# Altium PCB 滴速检测模块.pcbdoc
Units mil, origin at the board's own origin, x right, y up, seen from the top; angles counter-clockwise.
Board outline 1915 x 1400 mil, 2 copper layers (Top Layer, Bottom Layer); 15 components, 9 nets, 39 pads, 9 vias.
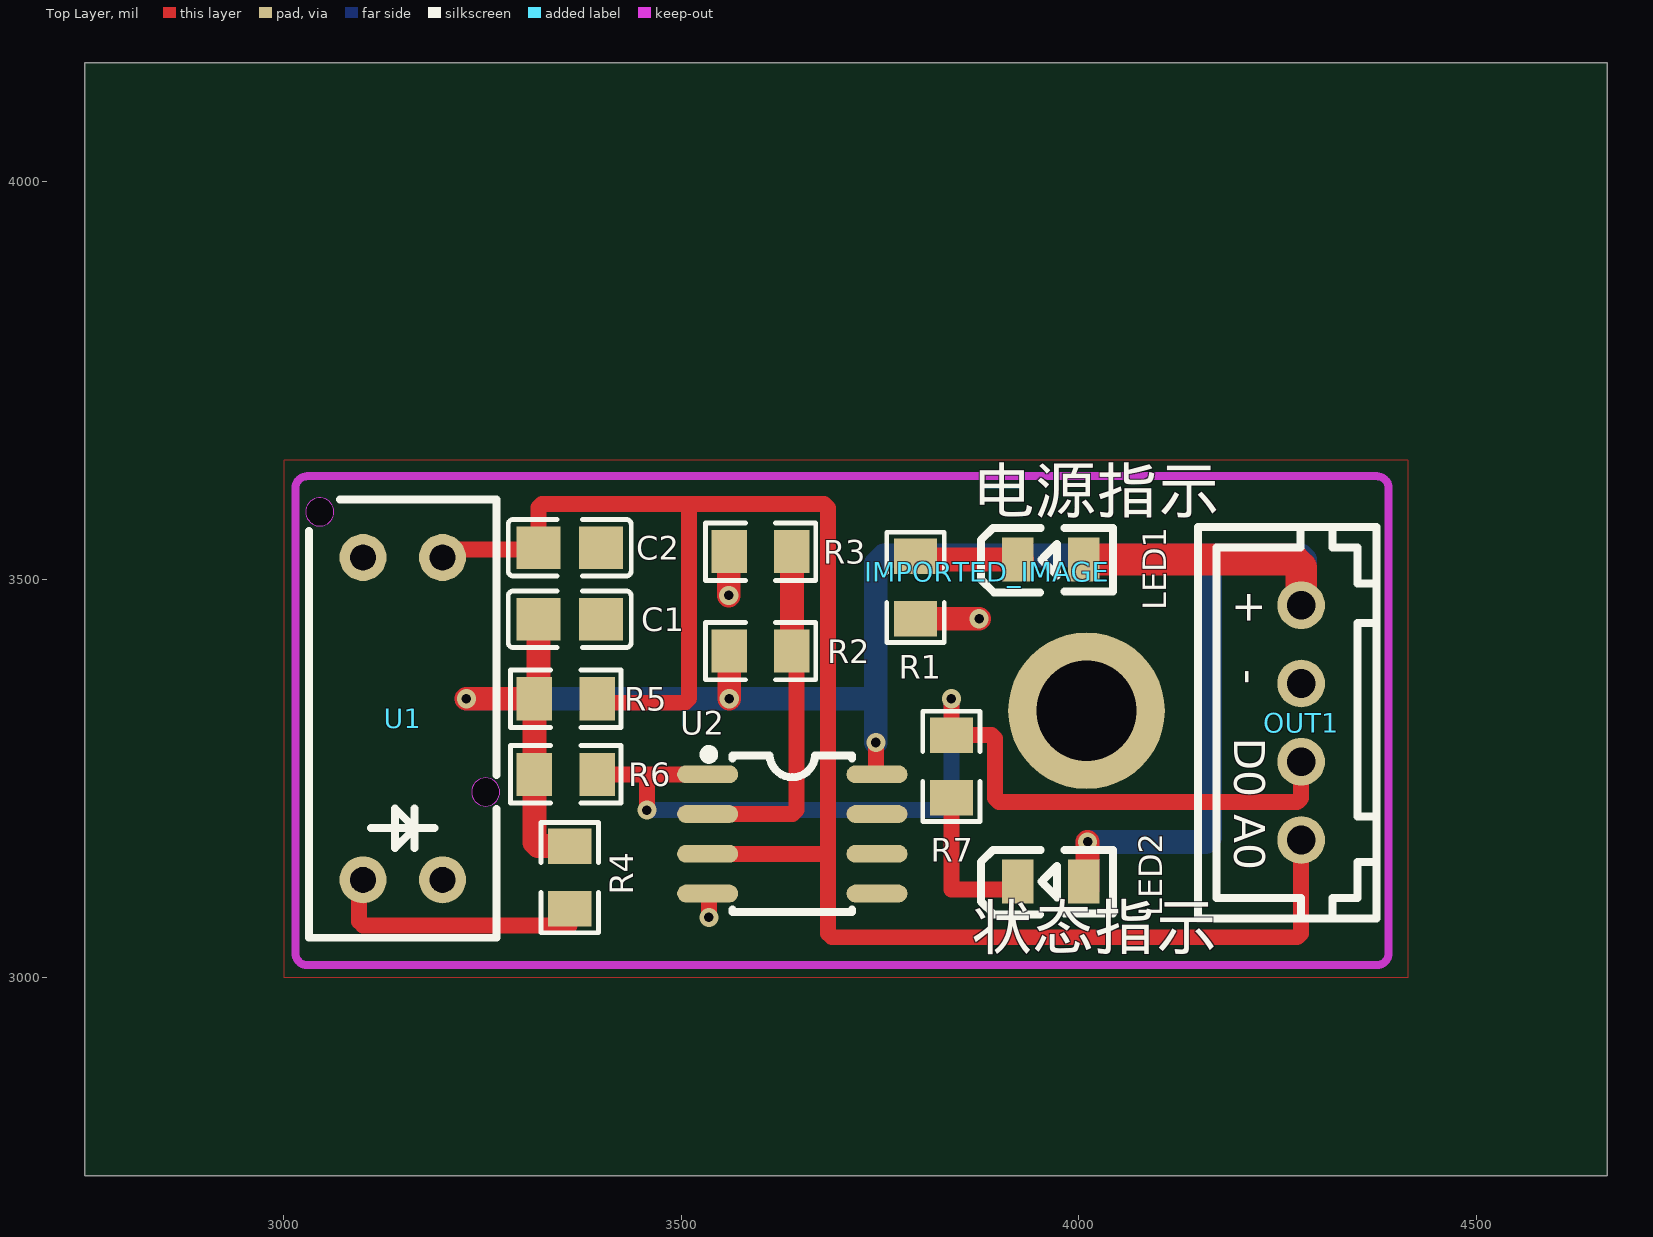
[diagram p0: Top Layer view]
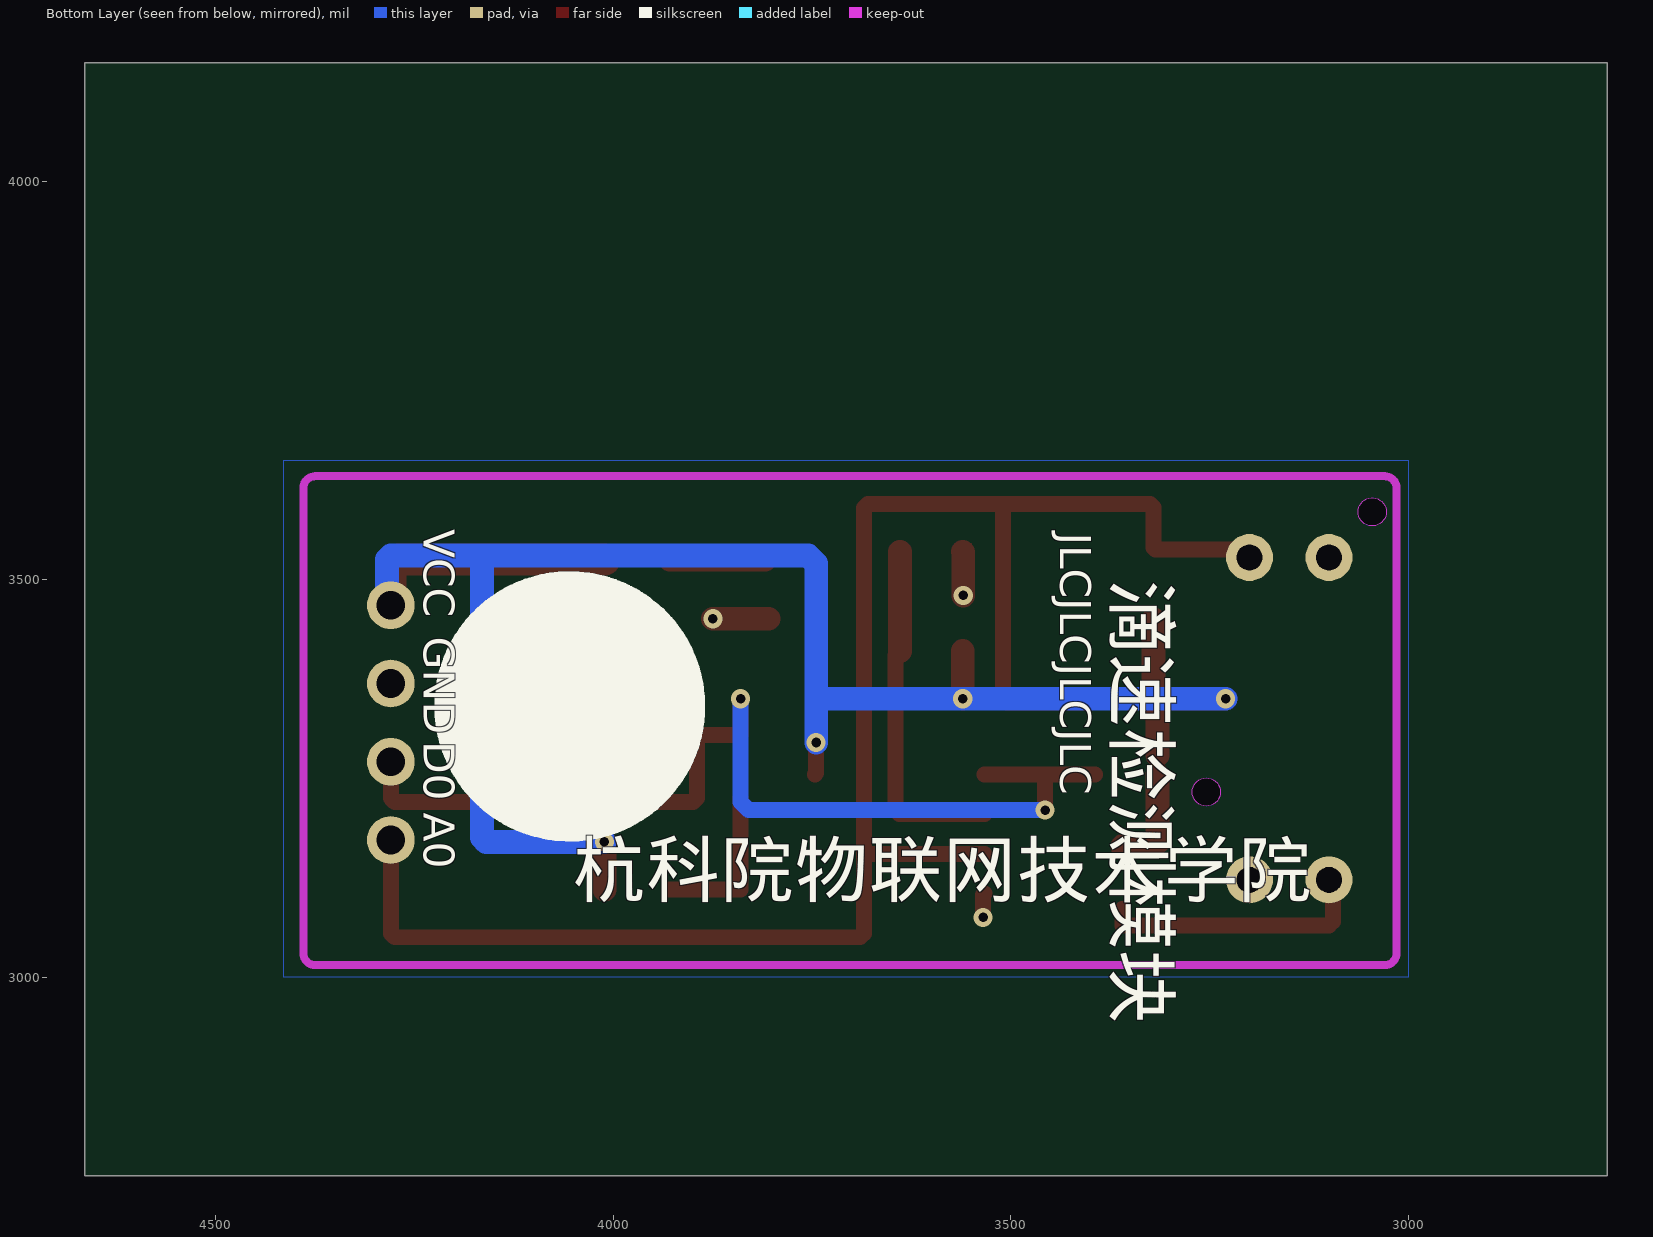
[diagram p1: Bottom Layer view, seen from below]

## Layer stack, top to bottom
Top Layer: signal copper (thickness not stored)
Dielectric: dielectric 12.6, FR-4, Dk 4.8
Bottom Layer: signal copper (thickness not stored)

## Board outline
4665,2750 2750,2750 2750,4150 4665,4150

## Components (designator, comment, footprint, x,y, rotation, side; value= is the part's Value field where it differs from the comment)
C1 "0805B104K500NT" C0805 3360,3450 r180 top
C2 "0805B104K500NT" C0805 3360,3540 r0 top
IMPORTED_IMAGE "IMPORTED_IMAGE" IMPORTED_IMAGE 3885,3510 r0 top
LED1 "NCD0805R1" LED0805-R-RD 3965,3525 r0 top
LED2 "NCD0805R1" LED0805-R-RD 3965,3120 r0 top
OUT1 "XH-4PA" 槽型光耦 4280,3320 r270 top
R1 "0805W8F1001T5E" R0805 3795,3490 r90 top
R2 "0805W8F1002T5E_C17414" R0805 3600,3410 r180 top
R3 "0805W8F1002T5E_C17414" R0805 3600,3535 r0 top
R4 "0805W8F1001T5E" R0805 3360,3125 r90 top
R5 "0805W8F1002T5E_C17414" R0805 3355,3350 r180 top
R6 "0805W8F1002T5E_C17414" R0805 3355,3255 r180 top
R7 "0805W8F1001T5E" R0805 3840,3265 r270 top
U1 "ITR9606" OPTO-TH_4P_ITR9606 3150,3325 r90 top
U2 "LM393DR" SOIC-8_L5.0-W4.0-P1.27-LS6.0-BL 3640,3180 r270 top

## Footprints (in the part's own frame and the unit in brackets; to place one, negate y for a bottom-side part, rotate by r counter-clockwise, add the part's x,y. Pads: shape width x height; smd on the part's side, far side on the other; paste and mask are expansions set on the pad)
C0805 [mm]
  rect 1.41x1.35 smd: 1(-1,0) 2(1,0)
  silkscreen extent -1.96,-0.9 1.96,0.9
IMPORTED_IMAGE [mil]
LED0805-R-RD [mm]
  rect 1x1.4 smd: 1(1.05,0) 2(-1.05,0)
  silkscreen extent -2.22,-1.04 1.99,1.01
OPTO-TH_4P_ITR9606 [mil]
  round 59.06 hole 32 slot 32.2 at 0 deg: 1(-202.76,49.99) 2(-202.76,-50.01)
  round 59.06 hole 32 slot 32.2 at 0 deg copper offset -0.02,0: 3(202.76,-50.02) 4(202.76,49.98)
  Multi-Layer board cut-out: 260.12,86.61 267.81,88.37 273.97,93.28 277.39,100.39 277.39,108.27 273.97,115.38 267.81,120.29 260.12,122.05 260.12,122.05 252.43,120.3 246.27,115.38 242.84,108.28 242.84,100.39 246.27,93.28 252.43,88.37 260.12,86.61
  Multi-Layer board cut-out: -92.28,-122.05 -83.42,-119.67 -76.94,-113.19 -74.56,-104.33 -76.94,-95.47 -83.42,-88.98 -92.28,-86.61 -92.28,-86.61 -101.14,-88.98 -107.63,-95.47 -110,-104.33 -107.63,-113.19 -101.14,-119.67 -92.28,-122.05
  Multi-Layer keep-out region: 260.12,86.61 267.81,88.37 273.97,93.28 277.39,100.39 277.39,108.27 273.97,115.38 267.81,120.29 260.12,122.05 260.12,122.05 252.43,120.3 246.27,115.38 242.84,108.28 242.84,100.39 246.27,93.28 252.43,88.37 260.12,86.61
  Multi-Layer keep-out region: -92.28,-122.05 -83.42,-119.67 -76.94,-113.19 -74.56,-104.33 -76.94,-95.47 -83.42,-88.98 -92.28,-86.61 -92.28,-86.61 -101.14,-88.98 -107.63,-95.47 -110,-104.33 -107.63,-113.19 -101.14,-119.67 -92.28,-122.05
  silkscreen extent -276,-118 276,118
R0805 [mm]
  rect 1.133x1.377 smd: 1(-1,0) 2(1,0)
  silkscreen extent -1.76,-0.92 1.76,0.92
SOIC-8_L5.0-W4.0-P1.27-LS6.0-BL [mil]
  oval 22.38x76.78 smd: 1(-75,-106.5) 2(-25,-106.5) 3(25,-106.5) 4(75,-106.5) 5(75,106.5) 6(25,106.5) 7(-25,106.5) 8(-75,106.5)
  silkscreen extent -106,-111 98,75
槽型光耦 [mil]
  round 60 hole 36: 1(-147.64,0) 2(-49.21,0.01) 3(49.21,0) 4(147.64,0.01)
  silkscreen extent -246,-130 246,94

## Free pads (board coordinates)
  round 196.9 hole 126: NC(4010,3335)

## Via types
v1: diameter 24.02, hole 12.01, Top Layer to Bottom Layer, 9 vias

## Nets (pads, with @x,y where several pads share a name; then routed paths per layer and width w, separated by ;. In a path a pad name is that pad's centre, name@x,y a point inside that pad or via, vN(x,y) a via of type N, cw(c..) or ccw(c..) an arc to the next point about the centre after c; other vN are vias at no path point)
$1N903: R4.1 U1.1 | length 349.9
  Top Layer w20: U1.1@3095,3132.24 3095,3070 3100,3065 3360,3065 R4.1
$1N933: R2.1 R3.2 U2.2 | length 440.9
  Top Layer w20: U2.2 3640,3205 3645,3210 3645,3404.37 R2.1
  Top Layer w30: R2.1 R3.2
$1N972: LED1.2 R1.2 | length 125.5
  Top Layer w30: R1.2@3805,3529.37 3809.37,3525 LED1.2@3928.65,3525
$1N1138: LED2.2 R7.2 | length 204.3
  Top Layer w20: R7.2 3840,3110 LED2.2@3928.65,3110
+5V: C1.2 LED1.1 LED2.1 OUT1.1 R2.2 R4.2 R5.2 R6.2 U2.8 | length 2744.6
  Top Layer w20: v1(3745,3295) 3745,3256.5 U2.8
  Top Layer w30: v1(3230,3350) R5.2 R5.2@3320.63,3350 ; R6.2 3315.63,3169.37 3320,3165 3359.37,3165 R4.2 ; R6.2@3315.63,3279.02 3315.63,3345 R5.2@3320.63,3350 ; C1.2 R5.2@3320.63,3350 ; v1(3560.63,3350) R2.2 ; LED2.1@4011.35,3110 v1(4011.35,3170)
  Top Layer w40: LED1.1@4011.35,3525 4270,3525 4280,3515 OUT1.1@4280,3462.64
  Bottom Layer w30: v1(3230,3350) v1(3560.63,3350) 3741.53,3350 3745,3353.47 ; v1(3745,3295) 3745,3353.47 ; v1(4011.35,3170) 4160,3170 4165.53,3175.53 4165.53,3530 ; OUT1.1@4280,3462.64 4285,3467.64 4285,3525 4280,3530 4165.53,3530 ; 3745,3353.47 3745,3520 3755,3530 4165.53,3530
A0: C2.1 OUT1.4 R5.1 U1.3 U2.3 | length 2310.4
  Top Layer w20: U1.3@3195,3537.76 3318.39,3537.76 C2.1 3320.63,3590.63 3325,3595 3505,3595 ; R5.1 3399.37,3345 3505,3345 3510,3350 3510,3590 3505,3595 ; U2.3 3684.76,3155 3685,3154.76 ; OUT1.4@4280,3167.36 4280,3055 4275,3050 3690,3050 3685,3055 3685,3154.76 ; 3505,3595 3680,3595 3685,3590 3685,3154.76
D0: OUT1.3 R6.1 R7.1 U2.1 | length 1308.7
  Top Layer w20: R6.1 3456.97,3255 ; v1(3456.97,3210) 3456.97,3255 ; U2.1 3456.97,3255 ; v1(3840,3350) R7.1 3890.63,3304.37 3895,3300 3895,3225 3900,3220 4275,3220 4280,3225 OUT1.3@4280,3265.79
  Bottom Layer w20: v1(3456.97,3210) 3830,3210 3840,3220 v1(3840,3350)
GND: C1.1 C2.2 OUT1.2 R1.1 R3.1 U1.2 U1.4 U2.4 | length 155.9
  Top Layer w20: U2.4 3535,3103.5 v1(3535,3075)
  Top Layer w30: v1(3560,3480) 3560,3534.37 R3.1 ; R1.1@3805,3450.63 v1(3875,3450.63)
"": pad.NC U2.5 U2.6 U2.7

## Polygon pours and split planes (outlines as drawn)
GND on Top Layer (solid, remove dead copper, pour order 0): 3000,3000 4415,3000 4415,3650 3000,3650
GND on Bottom Layer (solid, remove dead copper, pour order 1): 3000,3000 4415,3000 4415,3650 3000,3650

## Keep-outs
Board Outline Layer:
  lines w10 net "": 3015,3030 ccw(c3030,3030) 3030,3015 4375,3015 ccw(c4375,3030) 4390,3030 4390,3615 ccw(c4375,3615) 4375,3630 3030,3630 ccw(c3030,3615) 3015,3615 3015,3030

## Silkscreen, mask and mechanical layers (free items; w line width, h text height)
Top Silkscreen Layer:
  text "电源指示" at 3868.35,3584.7 h56.64
  text "状态指示" at 3865.21,3035.45 h56.64
Bottom Silkscreen Layer:
  text "VCC" at 4238.32,3563.32 h38.94 r90
  text "JLCJLCJLCJLC" at 3438.32,3558.71 h38.94 r90
  text "滴速检测模块" at 3367.54,3499.41 h67.97 r90
  text "GND" at 4238.32,3428.32 h38.94 r90
  text "D0" at 4238.32,3296.61 h38.94 r90
  text "A0" at 4238.32,3206.61 h38.94 r90
  text "杭科院物联网技术学院" at 4051.26,3102.54 h67.97

## Text inside footprints (layer, text, board x,y; h text height)
OUT1: Top Silkscreen Layer "+" at 4197.9,3487.32 h39.22 r270; Top Silkscreen Layer "-" at 4197.12,3386.93 h39.22 r270; Top Silkscreen Layer "D0" at 4195.68,3301.14 h38.94 r270; Top Silkscreen Layer "A0" at 4195.68,3204.69 h38.94 r270